# Altium PCB STM32F302VC_EVM.PcbDoc (part 3 of 19)
Units mil, origin at the board's own origin, x right, y up, seen from the top; angles counter-clockwise.
Board outline 3937.01 x 3937.01 mil, 2 copper layers (Top Layer, Bottom Layer); 117 components, 166 nets, 602 pads, 373 vias.
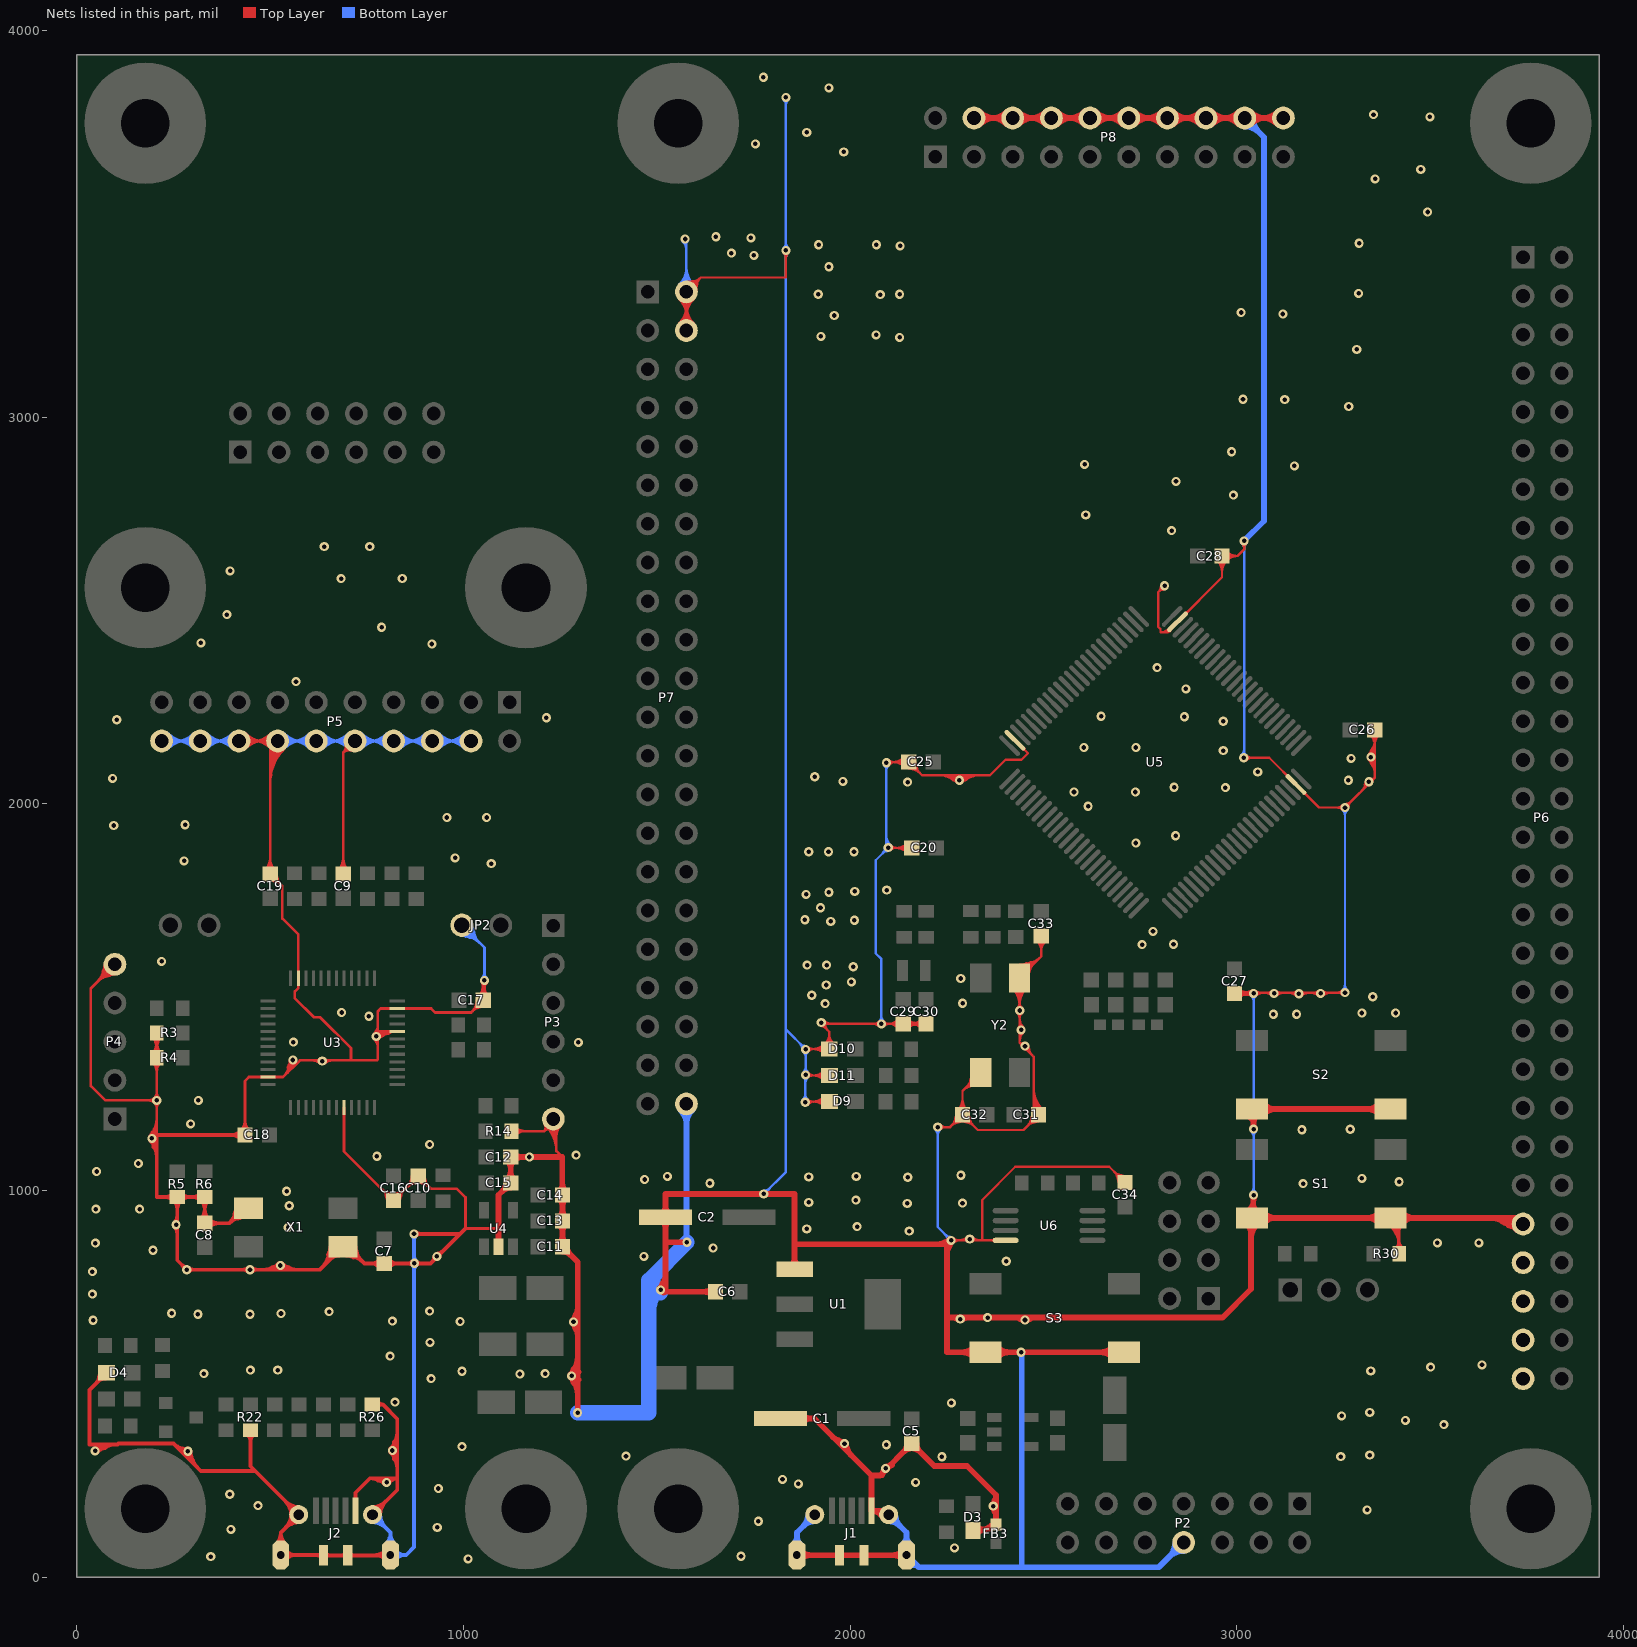
[diagram p3: the nets of this part, all layers, seen from the top]

## Via types
v1: diameter 23.62, hole 11.81, Top Layer to Bottom Layer, tented both sides, 372 vias
v2: diameter 50, hole 28, Top Layer to Bottom Layer, tented both sides, 1 vias

## Nets (pads, with @x,y where several pads share a name; then routed paths per layer and width w, separated by ;. In a path a pad name is that pad's centre, name@x,y a point inside that pad or via, vN(x,y) a via of type N, cw(c..) or ccw(c..) an arc to the next point about the centre after c; other vN are vias at no path point) (continued)
GND: (continued)
  Top Layer w6: P7.4@1576.38,3224.02 P7.2@1576.38,3324.02 1613.58,3361.22 ; v1(1833.66,3431.1) 1833.66,3361.22 1613.58,3361.22 ; v1(1883.86,1228.35) 1885.83,1230.32 D9.2@1946.72,1230.32 ; v1(1884.84,1299.13) 1886.73,1297.24 D11.2@1946.54,1297.24 ; v1@1885.83,1366.14 D10.2@1945.87,1366.14 1945.87,1410.43 1925.2,1431.1 v1(2080.71,1431.1) C29.1@2137.17,1431.1 C30.1@2196.22,1431.1 ; v1(2093.5,2106.3) 2095.47,2108.27 C25.1@2151.57,2108.27 2186.02,2073.82 2361.22,2073.82 2401.57,2114.17 2443.04,2114.17 2459.65,2130.78 U5.99@2426.07,2164.35 ; v1(2098.43,1886.81) 2099.41,1885.83 C20.1@2159.45,1885.83 ; v1(2226.38,1163.92) 2258.41,1163.92 C32.1@2290.35,1195.87 ; 2269.07,2068.61 cw(c2270.56,2047.31) v1@2284.57,2063.43 ; 2272.35,2067.43 ccw(c2284.59,2070.13) v1@2281.76,2057.92 ; v1@2280.39,2063.43 cw(c2294.4,2047.31) 2295.89,2068.61 ; v1@2283.2,2057.92 ccw(c2280.37,2070.13) 2292.61,2067.43 ; D3.2@2317.91,121.06 2362.2,121.06 ; Y2.4@2337.8,1304.99 2290.35,1257.55 ; FB3.1@2376.97,135.83 2362.2,121.06 ; U6.4@2402.05,871.06 2341.35,871.06 ; v1@2453.34,1364.9 cw(c2455.1,1353.24) 2462.14,1362.7 cw(c2465.86,1367.7) v1@2460.13,1370.15 ; C33.1@2494.09,1657.86 2494.09,1605.39 ; C34.1@2710.76,1020.67 2670.21,1061.21 2426.99,1061.21 2341.35,975.57 2341.35,871.06 ; v1(2812.99,2563.98) 2796.74,2547.72 2796.74,2457.45 2802.25,2451.93 2802.25,2443.9 2819.76,2443.9 U5.74@2846.44,2470.58 2961.61,2585.75 C28.1@2961.61,2640.75 3001.66,2640.75 ; C27.1@2994.09,1509.84 v1(3043.31,1509.84) ; v1(3017.72,2119.09) 3083.79,2119.09 U5.49@3152.67,2050.21 3212.6,1990.28 v1(3279.53,1990.28) 3356.3,2067.05 ; v1(3018.7,2680.12) 3018.7,2657.79 3001.66,2640.75 ; S1.2@3039.37,929.13 3043.31,933.07 v1(3043.31,988.19) ; S2.2@3039.37,1210.63 3043.31,1206.69 v1(3043.31,1158.95) ; v1@3045.28,1511.81 v1(3279.53,1511.81) ; v1@3333.45,2053.58 cw(c3328.01,2051.22) 3331.5,2046.43 cw(c3338.1,2037.36) v1@3340.02,2048.41 ; C26.1@3356.3,2190.94 3356.3,2067.05 ; S1.1@3397.64,929.13 3420.28,906.5 R30.2@3420.28,836.61 ; P7.4@1557.62,3242.77 ccw(c1512.33,3288.06) 1576.38,3288.06 ; P7.4@1557.62,3242.77 ccw(c1512.33,3288.06) 1576.38,3288.06 ; P7.4@1557.62,3242.77 ccw(c1512.33,3288.06) 1576.38,3288.06 ; P7.2@1557.62,3305.26 cw(c1512.33,3259.97) 1576.38,3259.97 ; P7.2@1557.62,3305.26 cw(c1512.33,3259.97) 1576.38,3259.97 ; P7.2@1557.62,3305.26 cw(c1512.33,3259.97) 1576.38,3259.97 ; P7.4@1561.86,3238.53 ccw(c1526.82,3273.57) 1576.38,3273.57 ; P7.4@1561.86,3238.53 ccw(c1526.82,3273.57) 1576.38,3273.57 ; P7.4@1561.86,3238.53 ccw(c1526.82,3273.57) 1576.38,3273.57 ; P7.2@1561.86,3309.5 cw(c1526.82,3274.46) 1576.38,3274.46 ; P7.2@1561.86,3309.5 cw(c1526.82,3274.46) 1576.38,3274.46 ; P7.2@1561.86,3309.5 cw(c1526.82,3274.46) 1576.38,3274.46 ; P7.2@1564.27,3333.65 cw(c1603.5,3302.43) 1597.83,3352.24 ; P7.2@1564.27,3333.65 cw(c1603.5,3302.43) 1597.83,3352.24 ; P7.2@1564.27,3333.65 cw(c1603.5,3302.43) 1597.83,3352.24 ; P7.4@1566.11,3234.29 ccw(c1541.31,3259.09) 1576.38,3259.09 ; P7.4@1566.11,3234.29 ccw(c1541.31,3259.09) 1576.38,3259.09 ; P7.4@1566.11,3234.29 ccw(c1541.31,3259.09) 1576.38,3259.09 ; P7.2@1566.11,3313.74 cw(c1541.31,3288.94) 1576.38,3288.94 ; P7.2@1566.11,3313.74 cw(c1541.31,3288.94) 1576.38,3288.94 ; P7.2@1566.11,3313.74 cw(c1541.31,3288.94) 1576.38,3288.94 ; 1576.38,3259.09 ccw(c1611.45,3259.09) P7.4@1586.65,3234.29 ; 1576.38,3259.09 ccw(c1611.45,3259.09) P7.4@1586.65,3234.29 ; 1576.38,3259.09 ccw(c1611.45,3259.09) P7.4@1586.65,3234.29 ; 1576.38,3259.97 cw(c1640.42,3259.97) P7.2@1595.14,3305.26 ; 1576.38,3259.97 cw(c1640.42,3259.97) P7.2@1595.14,3305.26 ; 1576.38,3259.97 cw(c1640.42,3259.97) P7.2@1595.14,3305.26 ; 1576.38,3273.57 ccw(c1625.94,3273.57) P7.4@1590.89,3238.53 ; 1576.38,3273.57 ccw(c1625.94,3273.57) P7.4@1590.89,3238.53 ; 1576.38,3273.57 ccw(c1625.94,3273.57) P7.4@1590.89,3238.53 ; 1576.38,3274.46 cw(c1625.94,3274.46) P7.2@1590.89,3309.5 ; 1576.38,3274.46 cw(c1625.94,3274.46) P7.2@1590.89,3309.5 ; 1576.38,3274.46 cw(c1625.94,3274.46) P7.2@1590.89,3309.5 ; 1576.38,3288.06 ccw(c1640.42,3288.06) P7.4@1595.14,3242.77 ; 1576.38,3288.06 ccw(c1640.42,3288.06) P7.4@1595.14,3242.77 ; 1576.38,3288.06 ccw(c1640.42,3288.06) P7.4@1595.14,3242.77 ; 1576.38,3288.94 cw(c1611.45,3288.94) P7.2@1586.65,3313.74 ; 1576.38,3288.94 cw(c1611.45,3288.94) P7.2@1586.65,3313.74 ; 1576.38,3288.94 cw(c1611.45,3288.94) P7.2@1586.65,3313.74 ; P7.2@1579.42,3344.32 ccw(c1583.88,3374.09) 1605.17,3352.8 ; P7.2@1579.42,3344.32 ccw(c1583.88,3374.09) 1605.17,3352.8 ; P7.2@1579.42,3344.32 ccw(c1583.88,3374.09) 1605.17,3352.8 ; P7.2@1580.31,3350.25 ccw(c1586.07,3388.73) 1613.58,3361.22 ; P7.2@1580.31,3350.25 ccw(c1586.07,3388.73) 1613.58,3361.22 ; P7.2@1580.31,3350.25 ccw(c1586.07,3388.73) 1613.58,3361.22 ; P7.2@1586.01,3311.91 ccw(c1554.8,3351.13) 1604.61,3345.47 ; P7.2@1586.01,3311.91 ccw(c1554.8,3351.13) 1604.61,3345.47 ; P7.2@1586.01,3311.91 ccw(c1554.8,3351.13) 1604.61,3345.47 ; P7.2@1596.68,3327.06 cw(c1626.46,3331.51) 1605.17,3352.8 ; P7.2@1596.68,3327.06 cw(c1626.46,3331.51) 1605.17,3352.8 ; P7.2@1596.68,3327.06 cw(c1626.46,3331.51) 1605.17,3352.8 ; P7.2@1602.61,3327.94 cw(c1641.09,3333.71) 1613.58,3361.22 ; P7.2@1602.61,3327.94 cw(c1641.09,3333.71) 1613.58,3361.22 ; P7.2@1602.61,3327.94 cw(c1641.09,3333.71) 1613.58,3361.22 ; v1@1827.43,3424.87 cw(c1812.39,3409.83) 1833.66,3409.83 ; v1@1827.43,3424.87 cw(c1812.39,3409.83) 1833.66,3409.83 ; v1@1827.43,3424.87 cw(c1812.39,3409.83) 1833.66,3409.83 ; 1833.66,3409.83 cw(c1854.93,3409.83) v1@1839.89,3424.87 ; 1833.66,3409.83 cw(c1854.93,3409.83) v1@1839.89,3424.87 ; 1833.66,3409.83 cw(c1854.93,3409.83) v1@1839.89,3424.87 ; v1@1890.09,1222.12 cw(c1909.88,1202.32) 1909.88,1230.32 ; v1@1890.09,1222.12 cw(c1909.88,1202.32) 1909.88,1230.32 ; v1@1890.09,1222.12 cw(c1909.88,1202.32) 1909.88,1230.32 ; v1@1890.09,1234.58 ccw(c1900.38,1244.86) 1900.38,1230.32 ; v1@1890.09,1234.58 ccw(c1900.38,1244.86) 1900.38,1230.32 ; v1@1890.09,1234.58 ccw(c1900.38,1244.86) 1900.38,1230.32 ; v1@1891.07,1292.9 cw(c1901.55,1282.42) 1901.55,1297.24 ; v1@1891.07,1292.9 cw(c1901.55,1282.42) 1901.55,1297.24 ; v1@1891.07,1292.9 cw(c1901.55,1282.42) 1901.55,1297.24 ; v1@1891.07,1305.36 ccw(c1910.68,1324.97) 1910.68,1297.24 ; v1@1891.07,1305.36 ccw(c1910.68,1324.97) 1910.68,1297.24 ; v1@1891.07,1305.36 ccw(c1910.68,1324.97) 1910.68,1297.24 ; v1@1891.07,1358.93 cw(c1908.49,1341.51) 1908.49,1366.14 ; v1@1891.07,1358.93 cw(c1908.49,1341.51) 1908.49,1366.14 ; v1@1891.07,1358.93 cw(c1908.49,1341.51) 1908.49,1366.14 ; v1@1891.07,1371.39 ccw(c1903.74,1384.05) 1903.74,1366.14 ; v1@1891.07,1371.39 ccw(c1903.74,1384.05) 1903.74,1366.14 ; v1@1891.07,1371.39 ccw(c1903.74,1384.05) 1903.74,1366.14 ; 1903.62,1366.14 cw(c1903.62,1325.86) D10.2@1932.1,1354.34 ; 1903.62,1366.14 ccw(c1903.62,1406.42) D10.2@1932.1,1377.94 ; 1903.62,1366.14 ccw(c1903.62,1406.42) D10.2@1932.1,1377.94 ; 1903.62,1366.14 cw(c1903.62,1325.86) D10.2@1932.1,1354.34 ; 1903.62,1366.14 ccw(c1903.62,1406.42) D10.2@1932.1,1377.94 ; 1903.62,1366.14 cw(c1903.62,1325.86) D10.2@1932.1,1354.34 ; 1904.29,1297.24 cw(c1904.29,1256.96) D11.2@1932.78,1285.45 ; 1904.29,1297.24 ccw(c1904.29,1337.53) D11.2@1932.78,1309.04 ; 1904.29,1297.24 ccw(c1904.29,1337.53) D11.2@1932.78,1309.04 ; 1904.29,1297.24 cw(c1904.29,1256.96) D11.2@1932.78,1285.45 ; 1904.29,1297.24 ccw(c1904.29,1337.53) D11.2@1932.78,1309.04 ; 1904.29,1297.24 cw(c1904.29,1256.96) D11.2@1932.78,1285.45 ; 1904.47,1230.32 cw(c1904.47,1190.03) D9.2@1932.96,1218.52 ; 1904.47,1230.32 ccw(c1904.47,1270.6) D9.2@1932.96,1242.11 ; 1904.47,1230.32 ccw(c1904.47,1270.6) D9.2@1932.96,1242.11 ; 1904.47,1230.32 cw(c1904.47,1190.03) D9.2@1932.96,1218.52 ; 1904.47,1230.32 ccw(c1904.47,1270.6) D9.2@1932.96,1242.11 ; 1904.47,1230.32 cw(c1904.47,1190.03) D9.2@1932.96,1218.52 ; 1918.1,1366.14 cw(c1918.1,1340.35) D10.2@1936.34,1358.59 ; 1918.1,1366.14 ccw(c1918.1,1391.94) D10.2@1936.34,1373.7 ; 1918.1,1366.14 ccw(c1918.1,1391.94) D10.2@1936.34,1373.7 ; 1918.1,1366.14 cw(c1918.1,1340.35) D10.2@1936.34,1358.59 ; 1918.1,1366.14 ccw(c1918.1,1391.94) D10.2@1936.34,1373.7 ; 1918.1,1366.14 cw(c1918.1,1340.35) D10.2@1936.34,1358.59 ; 1918.78,1297.24 cw(c1918.78,1271.45) D11.2@1937.02,1289.69 ; 1918.78,1297.24 ccw(c1918.78,1323.04) D11.2@1937.02,1304.8 ; 1918.78,1297.24 ccw(c1918.78,1323.04) D11.2@1937.02,1304.8 ; 1918.78,1297.24 cw(c1918.78,1271.45) D11.2@1937.02,1289.69 ; 1918.78,1297.24 ccw(c1918.78,1323.04) D11.2@1937.02,1304.8 ; 1918.78,1297.24 cw(c1918.78,1271.45) D11.2@1937.02,1289.69 ; 1918.96,1230.32 cw(c1918.96,1204.52) D9.2@1937.2,1222.76 ; 1918.96,1230.32 ccw(c1918.96,1256.11) D9.2@1937.2,1237.87 ; 1918.96,1230.32 ccw(c1918.96,1256.11) D9.2@1937.2,1237.87 ; 1918.96,1230.32 cw(c1918.96,1204.52) D9.2@1937.2,1222.76 ; 1918.96,1230.32 ccw(c1918.96,1256.11) D9.2@1937.2,1237.87 ; 1918.96,1230.32 cw(c1918.96,1204.52) D9.2@1937.2,1222.76 ; v1@1925.2,1425.24 cw(c1925.2,1411.1) 1935.2,1421.1 ; v1@1925.2,1425.24 cw(c1925.2,1411.1) 1935.2,1421.1 ; v1@1925.2,1425.24 cw(c1925.2,1411.1) 1935.2,1421.1 ; v1@1926.17,1437.09 cw(c1921.67,1423.02) 1935.94,1426.84 ; v1@1926.17,1437.09 cw(c1921.67,1423.02) 1935.94,1426.84 ; v1@1926.17,1437.09 cw(c1921.67,1423.02) 1935.94,1426.84 ; v1@1927.18,1436.04 ccw(c1939.11,1447.97) 1939.11,1431.1 ; v1@1927.18,1436.04 ccw(c1939.11,1447.97) 1939.11,1431.1 ; v1@1927.18,1436.04 ccw(c1939.11,1447.97) 1939.11,1431.1 ; v1@1928.01,1434.06 ccw(c1941.92,1434.06) 1932.08,1424.22 ; v1@1928.01,1434.06 ccw(c1941.92,1434.06) 1932.08,1424.22 ; v1@1928.01,1434.06 ccw(c1941.92,1434.06) 1932.08,1424.22 ; v1@1931.43,1427.82 cw(c1939.34,1419.91) 1939.34,1431.1 ; v1@1931.43,1427.82 cw(c1939.34,1419.91) 1939.34,1431.1 ; v1@1931.43,1427.82 cw(c1939.34,1419.91) 1939.34,1431.1 ; v1@1931.43,1440.29 ccw(c1953.6,1462.46) 1953.6,1431.1 ; v1@1931.43,1440.29 ccw(c1953.6,1462.46) 1953.6,1431.1 ; v1@1931.43,1440.29 ccw(c1953.6,1462.46) 1953.6,1431.1 ; v1@1934.01,1434.06 ccw(c1962.41,1434.06) 1942.33,1413.97 ; v1@1934.01,1434.06 ccw(c1962.41,1434.06) 1942.33,1413.97 ; v1@1934.01,1434.06 ccw(c1962.41,1434.06) 1942.33,1413.97 ; D10.2@1934.07,1377.94 ccw(c1905.59,1406.42) 1945.87,1406.42 ; D10.2@1934.07,1377.94 ccw(c1905.59,1406.42) 1945.87,1406.42 ; D10.2@1934.07,1377.94 ccw(c1905.59,1406.42) 1945.87,1406.42 ; D10.2@1938.31,1373.7 ccw(c1920.07,1391.94) 1945.87,1391.94 ; D10.2@1938.31,1373.7 ccw(c1920.07,1391.94) 1945.87,1391.94 ; D10.2@1938.31,1373.7 ccw(c1920.07,1391.94) 1945.87,1391.94 ; 1945.87,1391.94 ccw(c1971.66,1391.94) D10.2@1953.42,1373.7 ; 1945.87,1391.94 ccw(c1971.66,1391.94) D10.2@1953.42,1373.7 ; 1945.87,1391.94 ccw(c1971.66,1391.94) D10.2@1953.42,1373.7 ; 1945.87,1406.42 ccw(c1986.15,1406.42) D10.2@1957.66,1377.94 ; 1945.87,1406.42 ccw(c1986.15,1406.42) D10.2@1957.66,1377.94 ; 1945.87,1406.42 ccw(c1986.15,1406.42) D10.2@1957.66,1377.94 ; 2059.44,1431.1 cw(c2059.44,1409.83) v1@2074.48,1424.87 ; 2059.44,1431.1 ccw(c2059.44,1452.37) v1@2074.48,1437.33 ; 2059.44,1431.1 ccw(c2059.44,1452.37) v1@2074.48,1437.33 ; 2059.44,1431.1 cw(c2059.44,1409.83) v1@2074.48,1424.87 ; 2059.44,1431.1 ccw(c2059.44,1452.37) v1@2074.48,1437.33 ; 2059.44,1431.1 cw(c2059.44,1409.83) v1@2074.48,1424.87 ; v1@2086.94,1424.87 cw(c2101.98,1409.83) 2101.98,1431.1 ; v1@2086.94,1424.87 cw(c2101.98,1409.83) 2101.98,1431.1 ; v1@2086.94,1424.87 cw(c2101.98,1409.83) 2101.98,1431.1 ; v1@2086.94,1437.33 ccw(c2101.98,1452.37) 2101.98,1431.1 ; v1@2086.94,1437.33 ccw(c2101.98,1452.37) 2101.98,1431.1 ; v1@2086.94,1437.33 ccw(c2101.98,1452.37) 2101.98,1431.1 ; 2096.88,1431.1 cw(c2096.88,1390.82) C29.1@2125.37,1419.3 ; 2096.88,1431.1 ccw(c2096.88,1471.38) C29.1@2125.37,1442.9 ; 2096.88,1431.1 ccw(c2096.88,1471.38) C29.1@2125.37,1442.9 ; 2096.88,1431.1 cw(c2096.88,1390.82) C29.1@2125.37,1419.3 ; 2096.88,1431.1 ccw(c2096.88,1471.38) C29.1@2125.37,1442.9 ; 2096.88,1431.1 cw(c2096.88,1390.82) C29.1@2125.37,1419.3 ; v1@2099.73,2100.07 cw(c2119.53,2080.28) 2119.53,2108.27 ; v1@2099.73,2100.07 cw(c2119.53,2080.28) 2119.53,2108.27 ; v1@2099.73,2100.07 cw(c2119.53,2080.28) 2119.53,2108.27 ; v1@2099.73,2112.53 ccw(c2110.02,2122.82) 2110.02,2108.27 ; v1@2099.73,2112.53 ccw(c2110.02,2122.82) 2110.02,2108.27 ; v1@2099.73,2112.53 ccw(c2110.02,2122.82) 2110.02,2108.27 ; v1@2104.66,1880.58 cw(c2117.32,1867.92) 2117.32,1885.83 ; v1@2104.66,1880.58 cw(c2117.32,1867.92) 2117.32,1885.83 ; v1@2104.66,1880.58 cw(c2117.32,1867.92) 2117.32,1885.83 ; v1@2104.66,1893.04 ccw(c2122.07,1910.46) 2122.07,1885.83 ; v1@2104.66,1893.04 ccw(c2122.07,1910.46) 2122.07,1885.83 ; v1@2104.66,1893.04 ccw(c2122.07,1910.46) 2122.07,1885.83 ; 2111.29,2108.27 cw(c2111.29,2067.99) C25.1@2139.78,2096.47 ; 2111.29,2108.27 ccw(c2111.29,2148.55) C25.1@2139.78,2120.07 ; 2111.29,2108.27 ccw(c2111.29,2148.55) C25.1@2139.78,2120.07 ; 2111.29,2108.27 cw(c2111.29,2067.99) C25.1@2139.78,2096.47 ; 2111.29,2108.27 ccw(c2111.29,2148.55) C25.1@2139.78,2120.07 ; 2111.29,2108.27 cw(c2111.29,2067.99) C25.1@2139.78,2096.47 ; 2111.37,1431.1 cw(c2111.37,1405.31) C29.1@2129.61,1423.55 ; 2111.37,1431.1 ccw(c2111.37,1456.9) C29.1@2129.61,1438.66 ; 2111.37,1431.1 ccw(c2111.37,1456.9) C29.1@2129.61,1438.66 ; 2111.37,1431.1 cw(c2111.37,1405.31) C29.1@2129.61,1423.55 ; 2111.37,1431.1 ccw(c2111.37,1456.9) C29.1@2129.61,1438.66 ; 2111.37,1431.1 cw(c2111.37,1405.31) C29.1@2129.61,1423.55 ; 2119.17,1885.83 cw(c2119.17,1845.55) C20.1@2147.65,1874.03 ; 2119.17,1885.83 ccw(c2119.17,1926.11) C20.1@2147.65,1897.62 ; 2119.17,1885.83 ccw(c2119.17,1926.11) C20.1@2147.65,1897.62 ; 2119.17,1885.83 cw(c2119.17,1845.55) C20.1@2147.65,1874.03 ; 2119.17,1885.83 ccw(c2119.17,1926.11) C20.1@2147.65,1897.62 ; 2119.17,1885.83 cw(c2119.17,1845.55) C20.1@2147.65,1874.03 ; 2125.78,2108.27 cw(c2125.78,2082.47) C25.1@2144.02,2100.71 ; 2125.78,2108.27 ccw(c2125.78,2134.06) C25.1@2144.02,2115.82 ; 2125.78,2108.27 ccw(c2125.78,2134.06) C25.1@2144.02,2115.82 ; 2125.78,2108.27 cw(c2125.78,2082.47) C25.1@2144.02,2100.71 ; 2125.78,2108.27 ccw(c2125.78,2134.06) C25.1@2144.02,2115.82 ; 2125.78,2108.27 cw(c2125.78,2082.47) C25.1@2144.02,2100.71 ; 2133.65,1885.83 cw(c2133.65,1860.03) C20.1@2151.89,1878.27 ; 2133.65,1885.83 ccw(c2133.65,1911.62) C20.1@2151.89,1893.38 ; 2133.65,1885.83 ccw(c2133.65,1911.62) C20.1@2151.89,1893.38 ; 2133.65,1885.83 cw(c2133.65,1860.03) C20.1@2151.89,1878.27 ; 2133.65,1885.83 ccw(c2133.65,1911.62) C20.1@2151.89,1893.38 ; 2133.65,1885.83 cw(c2133.65,1860.03) C20.1@2151.89,1878.27 ; C25.1@2144.41,2106.8 ccw(c2167.18,2111.46) C25.1@2161.16,2089.01 ; C25.1@2144.41,2106.8 ccw(c2167.18,2111.46) C25.1@2161.16,2089.01 ; C25.1@2144.41,2106.8 ccw(c2167.18,2111.46) C25.1@2161.16,2089.01 ; C29.1@2144.72,1423.55 cw(c2162.96,1405.31) 2162.96,1431.1 ; C29.1@2144.72,1423.55 cw(c2162.96,1405.31) 2162.96,1431.1 ; C29.1@2144.72,1423.55 cw(c2162.96,1405.31) 2162.96,1431.1 ; C29.1@2144.72,1438.66 ccw(c2162.96,1456.9) 2162.96,1431.1 ; C29.1@2144.72,1438.66 ccw(c2162.96,1456.9) 2162.96,1431.1 ; C29.1@2144.72,1438.66 ccw(c2162.96,1456.9) 2162.96,1431.1 ; C29.1@2146.35,1425.65 cw(c2155.56,1420.18) 2158.07,1430.59 ; C29.1@2146.35,1425.65 cw(c2155.56,1420.18) 2158.07,1430.59 ; C29.1@2146.35,1425.65 cw(c2155.56,1420.18) 2158.07,1430.59 ; C29.1@2146.35,1425.65 cw(c2155.56,1420.18) 2158.07,1430.59 ; C29.1@2146.35,1436.56 ccw(c2155.56,1442.02) 2158.07,1431.62 ; C29.1@2146.35,1436.56 ccw(c2155.56,1442.02) 2158.07,1431.62 ; C29.1@2146.35,1436.56 ccw(c2155.56,1442.02) 2158.07,1431.62 ; C29.1@2146.35,1436.56 ccw(c2155.56,1442.02) 2158.07,1431.62 ; C29.1@2148.96,1419.3 cw(c2177.45,1390.82) C30.1@2177.45,1431.1 ; C29.1@2148.96,1419.3 cw(c2177.45,1390.82) C30.1@2177.45,1431.1 ; C29.1@2148.96,1419.3 cw(c2177.45,1390.82) C30.1@2177.45,1431.1 ; C29.1@2148.96,1442.9 ccw(c2177.45,1471.38) C30.1@2177.45,1431.1 ; C29.1@2148.96,1442.9 ccw(c2177.45,1471.38) C30.1@2177.45,1431.1 ; C29.1@2148.96,1442.9 ccw(c2177.45,1471.38) C30.1@2177.45,1431.1 ; C25.1@2150.29,2108 ccw(c2177.81,2113.64) 2170.54,2086.5 ; C25.1@2150.29,2108 ccw(c2177.81,2113.64) 2170.54,2086.5 ; C25.1@2150.29,2108 ccw(c2177.81,2113.64) 2170.54,2086.5 ; C29.1@2151.51,1422.58 cw(c2162.87,1415.84) 2165.97,1428.68 ; C29.1@2151.51,1422.58 cw(c2162.87,1415.84) 2165.97,1428.68 ; C29.1@2151.51,1422.58 cw(c2162.87,1415.84) 2165.97,1428.68 ; C29.1@2151.51,1422.58 cw(c2162.87,1415.84) 2165.97,1428.68 ; C29.1@2151.51,1439.62 ccw(c2162.87,1446.36) 2165.97,1433.52 ; C29.1@2151.51,1439.62 ccw(c2162.87,1446.36) 2165.97,1433.52 ; C29.1@2151.51,1439.62 ccw(c2162.87,1446.36) 2165.97,1433.52 ; C29.1@2151.51,1439.62 ccw(c2162.87,1446.36) 2165.97,1433.52 ; C25.1@2151.57,2091.58 cw(c2151.57,2051.3) 2180.06,2079.78 ; C25.1@2151.57,2091.58 cw(c2151.57,2051.3) 2180.06,2079.78 ; C25.1@2151.57,2091.58 cw(c2151.57,2051.3) 2180.06,2079.78 ; C25.1@2151.57,2097.58 cw(c2151.57,2071.79) C25.1@2169.82,2090.03 ; C25.1@2151.57,2097.58 cw(c2151.57,2071.79) C25.1@2169.82,2090.03 ; C25.1@2151.57,2097.58 cw(c2151.57,2071.79) C25.1@2169.82,2090.03 ; C29.1@2151.63,1422.78 cw(c2171.29,1411.47) 2165.97,1433.52 ; C29.1@2151.63,1422.78 cw(c2171.29,1411.47) 2165.97,1433.52 ; C29.1@2151.63,1422.78 cw(c2171.29,1411.47) 2165.97,1433.52 ; C29.1@2151.63,1422.78 cw(c2171.29,1411.47) 2165.97,1433.52 ; C29.1@2151.63,1439.42 ccw(c2171.29,1450.73) 2165.97,1428.68 ; C29.1@2151.63,1439.42 ccw(c2171.29,1450.73) 2165.97,1428.68 ; C29.1@2151.63,1439.42 ccw(c2171.29,1450.73) 2165.97,1428.68 ; C29.1@2151.63,1439.42 ccw(c2171.29,1450.73) 2165.97,1428.68 ; C25.1@2151.84,2109.56 cw(c2146.2,2082.03) 2173.34,2089.3 ; C25.1@2151.84,2109.56 cw(c2146.2,2082.03) 2173.34,2089.3 ; C25.1@2151.84,2109.56 cw(c2146.2,2082.03) 2173.34,2089.3 ; C25.1@2153.04,2115.43 cw(c2148.38,2092.67) C25.1@2170.83,2098.68 ; C25.1@2153.04,2115.43 cw(c2148.38,2092.67) C25.1@2170.83,2098.68 ; C25.1@2153.04,2115.43 cw(c2148.38,2092.67) C25.1@2170.83,2098.68 ; C29.1@2155.94,1431.1 cw(c2155.94,1390.82) C30.1@2184.42,1419.3 ; C29.1@2155.94,1431.1 ccw(c2155.94,1471.38) C30.1@2184.42,1442.9 ; C29.1@2155.94,1431.1 ccw(c2155.94,1471.38) C30.1@2184.42,1442.9 ; C29.1@2155.94,1431.1 cw(c2155.94,1390.82) C30.1@2184.42,1419.3 ; C29.1@2155.94,1431.1 ccw(c2155.94,1471.38) C30.1@2184.42,1442.9 ; C29.1@2155.94,1431.1 cw(c2155.94,1390.82) C30.1@2184.42,1419.3 ; C25.1@2162.26,2108.27 ccw(c2188.06,2108.27) C25.1@2169.82,2090.03 ; C25.1@2162.26,2108.27 ccw(c2188.06,2108.27) C25.1@2169.82,2090.03 ; C25.1@2162.26,2108.27 ccw(c2188.06,2108.27) C25.1@2169.82,2090.03 ; 2167.42,1428.68 cw(c2170.52,1415.84) C30.1@2181.87,1422.58 ; 2167.42,1428.68 ccw(c2162.09,1450.73) C30.1@2181.76,1439.42 ; 2167.42,1428.68 cw(c2170.52,1415.84) C30.1@2181.87,1422.58 ; 2167.42,1428.68 ccw(c2162.09,1450.73) C30.1@2181.76,1439.42 ; 2167.42,1428.68 ccw(c2162.09,1450.73) C30.1@2181.76,1439.42 ; 2167.42,1428.68 cw(c2170.52,1415.84) C30.1@2181.87,1422.58 ; 2167.42,1428.68 ccw(c2162.09,1450.73) C30.1@2181.76,1439.42 ; 2167.42,1428.68 cw(c2170.52,1415.84) C30.1@2181.87,1422.58 ; 2167.42,1428.68 ccw(c2162.09,1450.73) C30.1@2181.76,1439.42 ; 2167.42,1428.68 cw(c2170.52,1415.84) C30.1@2181.87,1422.58 ; 2167.42,1433.52 cw(c2162.09,1411.47) C30.1@2181.76,1422.78 ; 2167.42,1433.52 ccw(c2170.52,1446.36) C30.1@2181.87,1439.62 ; 2167.42,1433.52 cw(c2162.09,1411.47) C30.1@2181.76,1422.78 ; 2167.42,1433.52 ccw(c2170.52,1446.36) C30.1@2181.87,1439.62 ; 2167.42,1433.52 ccw(c2170.52,1446.36) C30.1@2181.87,1439.62 ; 2167.42,1433.52 cw(c2162.09,1411.47) C30.1@2181.76,1422.78 ; 2167.42,1433.52 ccw(c2170.52,1446.36) C30.1@2181.87,1439.62 ; 2167.42,1433.52 cw(c2162.09,1411.47) C30.1@2181.76,1422.78 ; 2167.42,1433.52 ccw(c2170.52,1446.36) C30.1@2181.87,1439.62 ; 2167.42,1433.52 cw(c2162.09,1411.47) C30.1@2181.76,1422.78 ; C25.1@2168.26,2108.27 ccw(c2208.54,2108.27) 2180.06,2079.78 ; C25.1@2168.26,2108.27 ccw(c2208.54,2108.27) 2180.06,2079.78 ; C25.1@2168.26,2108.27 ccw(c2208.54,2108.27) 2180.06,2079.78 ; 2170.42,1431.1 cw(c2170.42,1405.31) C30.1@2188.66,1423.55 ; 2170.42,1431.1 ccw(c2170.42,1456.9) C30.1@2188.66,1438.66 ; 2170.42,1431.1 ccw(c2170.42,1456.9) C30.1@2188.66,1438.66 ; 2170.42,1431.1 cw(c2170.42,1405.31) C30.1@2188.66,1423.55 ; 2170.42,1431.1 ccw(c2170.42,1456.9) C30.1@2188.66,1438.66 ; 2170.42,1431.1 cw(c2170.42,1405.31) C30.1@2188.66,1423.55 ; 2175.32,1430.59 cw(c2177.83,1420.18) C30.1@2187.03,1425.65 ; 2175.32,1430.59 cw(c2177.83,1420.18) C30.1@2187.03,1425.65 ; 2175.32,1430.59 cw(c2177.83,1420.18) C30.1@2187.03,1425.65 ; 2175.32,1430.59 cw(c2177.83,1420.18) C30.1@2187.03,1425.65 ; 2175.32,1430.59 cw(c2177.83,1420.18) C30.1@2187.03,1425.65 ; 2175.32,1431.62 ccw(c2177.83,1442.02) C30.1@2187.03,1436.56 ; 2175.32,1431.62 ccw(c2177.83,1442.02) C30.1@2187.03,1436.56 ; 2175.32,1431.62 ccw(c2177.83,1442.02) C30.1@2187.03,1436.56 ; 2175.32,1431.62 ccw(c2177.83,1442.02) C30.1@2187.03,1436.56 ; 2175.32,1431.62 ccw(c2177.83,1442.02) C30.1@2187.03,1436.56 ; 2230.32,2073.82 cw(c2230.32,2008.86) v1@2276.25,2054.79 ; 2230.32,2073.82 cw(c2230.32,2008.86) v1@2276.25,2054.79 ; 2230.32,2073.82 cw(c2230.32,2008.86) v1@2276.25,2054.79 ; v1@2232.61,1157.69 cw(c2247.65,1142.65) 2247.65,1163.92 ; v1@2232.61,1157.69 cw(c2247.65,1142.65) 2247.65,1163.92 ; v1@2232.61,1157.69 cw(c2247.65,1142.65) 2247.65,1163.92 ; v1@2232.61,1170.15 ccw(c2247.65,1185.19) 2247.65,1163.92 ; v1@2232.61,1170.15 ccw(c2247.65,1185.19) 2247.65,1163.92 ; v1@2232.61,1170.15 ccw(c2247.65,1185.19) 2247.65,1163.92 ; 2244.8,2073.82 cw(c2244.8,2023.35) v1@2280.49,2059.04 ; 2244.8,2073.82 cw(c2244.8,2023.35) v1@2280.49,2059.04 ; 2244.8,2073.82 cw(c2244.8,2023.35) v1@2280.49,2059.04 ; 2250.71,860.94 cw(c2255.81,855.84) v1@2258.07,862.69 ; 2250.71,860.94 ccw(c2245.6,866.05) v1@2252.46,868.31 ; 2250.71,860.94 ccw(c2245.6,866.05) v1@2252.46,868.31 ; 2250.71,860.94 cw(c2255.81,855.84) v1@2258.07,862.69 ; 2250.71,860.94 ccw(c2245.6,866.05) v1@2252.46,868.31 ; 2250.71,860.94 cw(c2255.81,855.84) v1@2258.07,862.69 ; 2250.7,860.94 v1(2260.83,871.06) 2341.35,871.06 ; 2258.05,2066.93 ccw(c2266.86,2080.14) v1@2276.9,2067.85 ; 2258.05,2066.93 ccw(c2266.86,2080.14) v1@2276.9,2067.85 ; 2258.05,2066.93 ccw(c2266.86,2080.14) v1@2276.9,2067.85 ; 2259.23,2071.31 ccw(c2271.57,2092.69) v1@2279.61,2069.35 ; 2259.23,2071.31 ccw(c2271.57,2092.69) v1@2279.61,2069.35 ; 2259.23,2071.31 ccw(c2271.57,2092.69) v1@2279.61,2069.35 ; 2259.29,2073.82 cw(c2259.29,2037.83) v1@2284.74,2063.28 ; 2259.29,2073.82 cw(c2259.29,2037.83) v1@2284.74,2063.28 ; 2259.29,2073.82 cw(c2259.29,2037.83) v1@2284.74,2063.28 ; 2261.87,1167.38 cw(c2290.35,1138.9) C32.1@2290.35,1179.18 ; 2261.87,1167.38 ccw(c2233.39,1195.87) C32.1@2273.67,1195.87 ; 2261.87,1167.38 ccw(c2233.39,1195.87) C32.1@2273.67,1195.87 ; 2261.87,1167.38 cw(c2290.35,1138.9) C32.1@2290.35,1179.18 ; 2261.87,1167.38 ccw(c2233.39,1195.87) C32.1@2273.67,1195.87 ; 2261.87,1167.38 cw(c2290.35,1138.9) C32.1@2290.35,1179.18 ; 2264.8,2062.43 ccw(c2272.23,2073.56) v1@2280.7,2063.2 ; 2264.8,2062.43 ccw(c2272.23,2073.56) v1@2280.7,2063.2 ; 2264.8,2062.43 ccw(c2272.23,2073.56) v1@2280.7,2063.2 ; v1@2267.06,864.83 cw(c2282.1,849.79) 2282.1,871.06 ; v1@2267.06,864.83 cw(c2282.1,849.79) 2282.1,871.06 ; v1@2267.06,864.83 cw(c2282.1,849.79) 2282.1,871.06 ; v1@2267.06,877.29 ccw(c2282.1,892.33) 2282.1,871.06 ; v1@2267.06,877.29 ccw(c2282.1,892.33) 2282.1,871.06 ; v1@2267.06,877.29 ccw(c2282.1,892.33) 2282.1,871.06 ; 2267.06,2073.48 cw(c2260.44,2062) v1@2273.68,2061.41 ; 2267.06,2073.48 cw(c2260.44,2062) v1@2273.68,2061.41 ; 2267.06,2073.48 cw(c2260.44,2062) v1@2273.68,2061.41 ; 2268.38,2066.03 cw(c2262.38,2055.64) v1@2273.97,2058.74 ; 2268.38,2066.03 cw(c2262.38,2055.64) v1@2273.97,2058.74 ; 2268.38,2066.03 cw(c2262.38,2055.64) v1@2273.97,2058.74 ; 2268.59,1176.9 cw(c2295.73,1169.63) C32.1@2290.09,1197.15 ; 2268.59,1176.9 cw(c2295.73,1169.63) C32.1@2290.09,1197.15 ; 2268.59,1176.9 cw(c2295.73,1169.63) C32.1@2290.09,1197.15 ; 2270.62,2064.73 ccw(c2277.25,2076.21) v1@2281.56,2063.68 ; 2270.62,2064.73 ccw(c2277.25,2076.21) v1@2281.56,2063.68 ; 2270.62,2064.73 ccw(c2277.25,2076.21) v1@2281.56,2063.68 ; C32.1@2271.1,1186.28 cw(c2293.55,1180.26) C32.1@2288.89,1203.03 ; C32.1@2271.1,1186.28 cw(c2293.55,1180.26) C32.1@2288.89,1203.03 ; C32.1@2271.1,1186.28 cw(c2293.55,1180.26) C32.1@2288.89,1203.03 ; 2271.39,1174.1 ccw(c2264.12,1201.24) C32.1@2291.64,1195.6 ; 2271.39,1174.1 ccw(c2264.12,1201.24) C32.1@2291.64,1195.6 ; 2271.39,1174.1 ccw(c2264.12,1201.24) C32.1@2291.64,1195.6 ; 2272.04,2070.61 ccw(c2277.42,2079.92) v1@2280.2,2069.53 ; 2272.04,2070.61 ccw(c2277.42,2079.92) v1@2280.2,2069.53 ; 2272.04,2070.61 ccw(c2277.42,2079.92) v1@2280.2,2069.53 ; C32.1@2272.11,1177.63 cw(c2290.35,1159.39) C32.1@2290.35,1185.18 ; C32.1@2272.11,1177.63 ccw(c2253.87,1195.87) C32.1@2279.67,1195.87 ; C32.1@2272.11,1177.63 ccw(c2253.87,1195.87) C32.1@2279.67,1195.87 ; C32.1@2272.11,1177.63 cw(c2290.35,1159.39) C32.1@2290.35,1185.18 ; C32.1@2272.11,1177.63 ccw(c2253.87,1195.87) C32.1@2279.67,1195.87 ; C32.1@2272.11,1177.63 cw(c2290.35,1159.39) C32.1@2290.35,1185.18 ; 2273.77,2073.82 cw(c2273.77,2052.32) v1@2288.98,2067.52 ; 2273.77,2073.82 cw(c2273.77,2052.32) v1@2288.98,2067.52 ; 2273.77,2073.82 cw(c2273.77,2052.32) v1@2288.98,2067.52 ; v1@2275.98,2067.52 cw(c2291.19,2052.32) 2291.19,2073.82 ; v1@2275.98,2067.52 cw(c2291.19,2052.32) 2291.19,2073.82 ; v1@2275.98,2067.52 cw(c2291.19,2052.32) 2291.19,2073.82 ; C32.1@2278.56,1207.66 ccw(c2250.07,1236.15) 2290.35,1236.15 ; C32.1@2278.56,1207.66 ccw(c2250.07,1236.15) 2290.35,1236.15 ; C32.1@2278.56,1207.66 ccw(c2250.07,1236.15) 2290.35,1236.15 ; 2280.27,871.06 ccw(c2280.27,902.96) v1@2302.82,880.41 ; 2280.27,871.06 ccw(c2280.27,902.96) v1@2302.82,880.41 ; 2280.27,871.06 ccw(c2280.27,902.96) v1@2302.82,880.41 ; v1@2280.23,2063.28 cw(c2305.67,2037.83) 2305.67,2073.82 ; v1@2280.23,2063.28 cw(c2305.67,2037.83) 2305.67,2073.82 ; v1@2280.23,2063.28 cw(c2305.67,2037.83) 2305.67,2073.82 ; C32.1@2280.77,1176.61 ccw(c2274.75,1199.06) C32.1@2297.52,1194.4 ; C32.1@2280.77,1176.61 ccw(c2274.75,1199.06) C32.1@2297.52,1194.4 ; C32.1@2280.77,1176.61 ccw(c2274.75,1199.06) C32.1@2297.52,1194.4 ; C32.1@2282.8,1203.42 ccw(c2264.56,1221.66) 2290.35,1221.66 ; C32.1@2282.8,1203.42 ccw(c2264.56,1221.66) 2290.35,1221.66 ; C32.1@2282.8,1203.42 ccw(c2264.56,1221.66) 2290.35,1221.66 ; C32.1@2283.19,1194.4 ccw(c2305.96,1199.06) C32.1@2299.94,1176.61 ; C32.1@2283.19,1194.4 ccw(c2305.96,1199.06) C32.1@2299.94,1176.61 ; C32.1@2283.19,1194.4 ccw(c2305.96,1199.06) C32.1@2299.94,1176.61 ; v1@2283.4,2063.68 ccw(c2287.71,2076.21) 2294.34,2064.73 ; v1@2283.4,2063.68 ccw(c2287.71,2076.21) 2294.34,2064.73 ; v1@2283.4,2063.68 ccw(c2287.71,2076.21) 2294.34,2064.73 ; v1@2284.26,2063.2 ccw(c2292.73,2073.56) 2300.16,2062.43 ; v1@2284.26,2063.2 ccw(c2292.73,2073.56) 2300.16,2062.43 ; v1@2284.26,2063.2 ccw(c2292.73,2073.56) 2300.16,2062.43 ; v1@2284.47,2059.04 cw(c2320.16,2023.35) 2320.16,2073.82 ; v1@2284.47,2059.04 cw(c2320.16,2023.35) 2320.16,2073.82 ; v1@2284.47,2059.04 cw(c2320.16,2023.35) 2320.16,2073.82 ; v1@2284.76,2069.53 ccw(c2287.54,2079.92) 2292.92,2070.61 ; v1@2284.76,2069.53 ccw(c2287.54,2079.92) 2292.92,2070.61 ; v1@2284.76,2069.53 ccw(c2287.54,2079.92) 2292.92,2070.61 ; v1@2285.35,2069.35 ccw(c2293.39,2092.69) 2305.74,2071.31 ; v1@2285.35,2069.35 ccw(c2293.39,2092.69) 2305.74,2071.31 ; v1@2285.35,2069.35 ccw(c2293.39,2092.69) 2305.74,2071.31 ; v1@2288.06,2067.85 ccw(c2298.1,2080.14) 2306.91,2066.93 ; v1@2288.06,2067.85 ccw(c2298.1,2080.14) 2306.91,2066.93 ; v1@2288.06,2067.85 ccw(c2298.1,2080.14) 2306.91,2066.93 ; v1@2288.71,2054.79 cw(c2334.64,2008.86) 2334.64,2073.82 ; v1@2288.71,2054.79 cw(c2334.64,2008.86) 2334.64,2073.82 ; v1@2288.71,2054.79 cw(c2334.64,2008.86) 2334.64,2073.82 ; C32.1@2289.07,1195.6 ccw(c2316.59,1201.24) 2309.32,1174.1 ; C32.1@2289.07,1195.6 ccw(c2316.59,1201.24) 2309.32,1174.1 ; C32.1@2289.07,1195.6 ccw(c2316.59,1201.24) 2309.32,1174.1 ; C32.1@2290.35,1179.18 cw(c2290.35,1138.9) 2318.84,1167.38 ; C32.1@2290.35,1179.18 cw(c2290.35,1138.9) 2318.84,1167.38 ; C32.1@2290.35,1179.18 cw(c2290.35,1138.9) 2318.84,1167.38 ; C32.1@2290.35,1185.18 cw(c2290.35,1159.39) C32.1@2308.59,1177.63 ; C32.1@2290.35,1185.18 cw(c2290.35,1159.39) C32.1@2308.59,1177.63 ; C32.1@2290.35,1185.18 cw(c2290.35,1159.39) C32.1@2308.59,1177.63 ; C32.1@2290.35,1195.87 2290.35,1257.55 ; C32.1@2290.35,1195.87 2329.72,1156.5 2447.83,1156.5 C31.1@2487.2,1195.87 2474.35,1208.72 2474.35,1346.12 2437.8,1382.68 ; 2290.35,1221.66 ccw(c2316.15,1221.66) C32.1@2297.91,1203.42 ; 2290.35,1221.66 ccw(c2316.15,1221.66) C32.1@2297.91,1203.42 ; 2290.35,1221.66 ccw(c2316.15,1221.66) C32.1@2297.91,1203.42 ; 2290.35,1236.15 ccw(c2330.64,1236.15) C32.1@2302.15,1207.66 ; 2290.35,1236.15 ccw(c2330.64,1236.15) C32.1@2302.15,1207.66 ; 2290.35,1236.15 ccw(c2330.64,1236.15) C32.1@2302.15,1207.66 ; 2290.36,1257.55 cw(c2324.69,1223.22) Y2.4@2333.39,1270.99 ; 2290.36,1257.55 cw(c2324.69,1223.22) Y2.4@2333.39,1270.99 ; 2290.36,1257.55 cw(c2324.69,1223.22) Y2.4@2333.39,1270.99 ; C32.1@2290.62,1197.15 cw(c2284.98,1169.63) 2312.12,1176.9 ; C32.1@2290.62,1197.15 cw(c2284.98,1169.63) 2312.12,1176.9 ; C32.1@2290.62,1197.15 cw(c2284.98,1169.63) 2312.12,1176.9 ; v1@2290.99,2058.74 cw(c2302.58,2055.64) 2296.58,2066.03 ; v1@2290.99,2058.74 cw(c2302.58,2055.64) 2296.58,2066.03 ; v1@2290.99,2058.74 cw(c2302.58,2055.64) 2296.58,2066.03 ; v1@2291.28,2061.41 cw(c2304.53,2062) 2297.9,2073.48 ; v1@2291.28,2061.41 cw(c2304.53,2062) 2297.9,2073.48 ; v1@2291.28,2061.41 cw(c2304.53,2062) 2297.9,2073.48 ; C32.1@2291.82,1203.03 cw(c2287.16,1180.26) C32.1@2309.61,1186.28 ; C32.1@2291.82,1203.03 cw(c2287.16,1180.26) C32.1@2309.61,1186.28 ; C32.1@2291.82,1203.03 cw(c2287.16,1180.26) C32.1@2309.61,1186.28 ; 2294.75,871.06 ccw(c2294.75,888.48) v1@2307.07,876.16 ; 2294.75,871.06 ccw(c2294.75,888.48) v1@2307.07,876.16 ; 2294.75,871.06 ccw(c2294.75,888.48) v1@2307.07,876.16 ; 2295.3,871.06 cw(c2295.3,860.42) v1@2302.82,867.95 ; 2295.3,871.06 cw(c2295.3,860.42) v1@2302.82,867.95 ; 2295.3,871.06 cw(c2295.3,860.42) v1@2302.82,867.95 ; 2298.45,1265.65 cw(c2327.19,1236.91) Y2.4@2334.47,1276.89 ; 2298.45,1265.65 cw(c2327.19,1236.91) Y2.4@2334.47,1276.89 ; 2298.45,1265.65 cw(c2327.19,1236.91) Y2.4@2334.47,1276.89 ; C32.1@2301.04,1195.87 ccw(c2326.84,1195.87) C32.1@2308.59,1177.63 ; C32.1@2301.04,1195.87 ccw(c2326.84,1195.87) C32.1@2308.59,1177.63 ; C32.1@2301.04,1195.87 ccw(c2326.84,1195.87) C32.1@2308.59,1177.63 ; 2302.83,1270.03 ccw(c2277.71,1295.15) Y2.4@2313.24,1295.15 ; 2302.83,1270.03 ccw(c2277.71,1295.15) Y2.4@2313.24,1295.15 ; 2302.83,1270.03 ccw(c2277.71,1295.15) Y2.4@2313.24,1295.15 ; 2306.54,1273.74 cw(c2329.68,1250.6) Y2.4@2335.54,1282.79 ; 2306.54,1273.74 cw(c2329.68,1250.6) Y2.4@2335.54,1282.79 ; 2306.54,1273.74 cw(c2329.68,1250.6) Y2.4@2335.54,1282.79 ; C32.1@2307.04,1195.87 ccw(c2347.32,1195.87) 2318.84,1167.38 ; C32.1@2307.04,1195.87 ccw(c2347.32,1195.87) 2318.84,1167.38 ; C32.1@2307.04,1195.87 ccw(c2347.32,1195.87) 2318.84,1167.38 ; 2308.43,1277.21 cw(c2338.93,1269.04) Y2.4@2337.56,1300.59 ; 2308.43,1277.21 cw(c2338.93,1269.04) Y2.4@2337.56,1300.59 ; 2308.43,1277.21 cw(c2338.93,1269.04) Y2.4@2337.56,1300.59 ; 2310.18,1269.09 ccw(c2305.83,1322.28) Y2.4@2346.52,1287.75 ; 2310.18,1269.09 ccw(c2305.83,1322.28) Y2.4@2346.52,1287.75 ; 2310.18,1269.09 ccw(c2305.83,1322.28) Y2.4@2346.52,1287.75 ; Y2.4@2310.55,1285.11 cw(c2338.56,1277.61) Y2.4@2337.3,1306.58 ; Y2.4@2310.55,1285.11 cw(c2338.56,1277.61) Y2.4@2337.3,1306.58 ; Y2.4@2310.55,1285.11 cw(c2338.56,1277.61) Y2.4@2337.3,1306.58 ; v1@2311.04,876.16 ccw(c2323.36,888.48) 2323.36,871.06 ; v1@2311.04,876.16 ccw(c2323.36,888.48) 2323.36,871.06 ; v1@2311.04,876.16 ccw(c2323.36,888.48) 2323.36,871.06 ; Y2.4@2313.07,1280.27 ccw(c2298.19,1295.15) Y2.4@2319.24,1295.15 ; Y2.4@2313.07,1280.27 ccw(c2298.19,1295.15) Y2.4@2319.24,1295.15 ; Y2.4@2313.07,1280.27 ccw(c2298.19,1295.15) Y2.4@2319.24,1295.15 ; v1@2315.29,867.95 cw(c2322.81,860.42) 2322.81,871.06 ; v1@2315.29,867.95 cw(c2322.81,860.42) 2322.81,871.06 ; v1@2315.29,867.95 cw(c2322.81,860.42) 2322.81,871.06 ; v1@2315.29,880.41 ccw(c2337.84,902.96) 2337.84,871.06 ; v1@2315.29,880.41 ccw(c2337.84,902.96) 2337.84,871.06 ; v1@2315.29,880.41 ccw(c2337.84,902.96) 2337.84,871.06 ; D3.2@2320.05,121.06 ccw(c2320.05,190.77) FB3.1@2369.35,141.48 ; D3.2@2320.05,121.06 ccw(c2320.05,190.77) FB3.1@2369.35,141.48 ; D3.2@2320.05,121.06 ccw(c2320.05,190.77) FB3.1@2369.35,141.48 ; Y2.4@2324.62,1270.27 ccw(c2321.45,1309.03) Y2.4@2351.09,1283.86 ; Y2.4@2324.62,1270.27 ccw(c2321.45,1309.03) Y2.4@2351.09,1283.86 ; Y2.4@2324.62,1270.27 ccw(c2321.45,1309.03) Y2.4@2351.09,1283.86 ; D3.2@2325.47,113.51 cw(c2343.71,95.27) 2343.71,121.06 ; D3.2@2325.47,113.51 cw(c2343.71,95.27) 2343.71,121.06 ; D3.2@2325.47,113.51 cw(c2343.71,95.27) 2343.71,121.06 ; D3.2@2325.47,128.62 ccw(c2343.71,146.86) 2343.71,121.06 ; D3.2@2325.47,128.62 ccw(c2343.71,146.86) 2343.71,121.06 ; D3.2@2325.47,128.62 ccw(c2343.71,146.86) 2343.71,121.06 ; D3.2@2325.53,130.53 ccw(c2336.47,141.29) 2340.4,126.45 ; D3.2@2325.53,130.53 ccw(c2336.47,141.29) 2340.4,126.45 ; D3.2@2325.53,130.53 ccw(c2336.47,141.29) 2340.4,126.45 ; D3.2@2325.53,130.53 ccw(c2336.47,141.29) 2340.4,126.45 ; D3.2@2325.53,130.53 ccw(c2336.47,141.29) 2340.4,126.45 ; D3.2@2329.71,109.26 cw(c2358.19,80.78) 2358.19,121.06 ; D3.2@2329.71,109.26 cw(c2358.19,80.78) 2358.19,121.06 ; D3.2@2329.71,109.26 cw(c2358.19,80.78) 2358.19,121.06 ; D3.2@2329.71,132.86 ccw(c2358.19,161.34) 2358.19,121.06 ; D3.2@2329.71,132.86 ccw(c2358.19,161.34) 2358.19,121.06 ; D3.2@2329.71,132.86 ccw(c2358.19,161.34) 2358.19,121.06 ; D3.2@2329.81,134.73 ccw(c2344.95,149.64) 2350.39,129.1 ; D3.2@2329.81,134.73 ccw(c2344.95,149.64) 2350.39,129.1 ; D3.2@2329.81,134.73 ccw(c2344.95,149.64) 2350.39,129.1 ; D3.2@2329.81,134.73 ccw(c2344.95,149.64) 2350.39,129.1 ; D3.2@2329.81,134.73 ccw(c2344.95,149.64) 2350.39,129.1 ; D3.2@2332.59,115.09 cw(c2357.7,101.48) 2350.39,129.1 ; D3.2@2332.59,115.09 cw(c2357.7,101.48) 2350.39,129.1 ; D3.2@2332.59,115.09 cw(c2357.7,101.48) 2350.39,129.1 ; D3.2@2332.59,115.09 cw(c2357.7,101.48) 2350.39,129.1 ; D3.2@2332.59,115.09 cw(c2357.7,101.48) 2350.39,129.1 ; D3.2@2332.62,115.16 cw(c2345.61,108.2) 2342.8,122.67 ; D3.2@2332.62,115.16 cw(c2345.61,108.2) 2342.8,122.67 ; D3.2@2332.62,115.16 cw(c2345.61,108.2) 2342.8,122.67 ; D3.2@2332.62,115.16 cw(c2345.61,108.2) 2342.8,122.67 ; D3.2@2332.62,115.16 cw(c2345.61,108.2) 2342.8,122.67 ; D3.2@2333.84,128.02 ccw(c2341.31,130.36) 2342.81,122.67 ; D3.2@2333.84,128.02 ccw(c2341.31,130.36) 2342.81,122.67 ; D3.2@2333.84,128.02 ccw(c2341.31,130.36) 2342.81,122.67 ; D3.2@2333.84,128.02 ccw(c2341.31,130.36) 2342.81,122.67 ; D3.2@2333.84,128.02 ccw(c2341.31,130.36) 2342.81,122.67 ; D3.2@2334.54,121.06 ccw(c2334.54,176.29) FB3.1@2373.59,137.24 ; D3.2@2334.54,121.06 ccw(c2334.54,176.29) FB3.1@2373.59,137.24 ; D3.2@2334.54,121.06 ccw(c2334.54,176.29) FB3.1@2373.59,137.24 ; 2349.02,121.06 ccw(c2349.02,161.8) FB3.1@2377.83,133 ; 2349.02,121.06 ccw(c2349.02,161.8) FB3.1@2377.83,133 ; 2349.02,121.06 ccw(c2349.02,161.8) FB3.1@2377.83,133 ; 2351.12,129.12 cw(c2358.67,117.99) FB3.1@2368.82,126.8 ; 2351.12,129.12 cw(c2358.67,117.99) FB3.1@2368.82,126.8 ; 2351.12,129.12 cw(c2358.67,117.99) FB3.1@2368.82,126.8 ; 2351.14,124.28 cw(c2361.58,106.2) FB3.1@2371.73,124.44 ; 2351.14,124.28 cw(c2361.58,106.2) FB3.1@2371.73,124.44 ; 2351.14,124.28 cw(c2361.58,106.2) FB3.1@2371.73,124.44 ; 2356.71,132.91 cw(c2363.81,122.45) FB3.1@2373.36,130.73 ; 2356.71,132.91 cw(c2363.81,122.45) FB3.1@2373.36,130.73 ; 2356.71,132.91 cw(c2363.81,122.45) FB3.1@2373.36,130.73 ; 2358.98,122.11 cw(c2367.97,106.53) FB3.1@2373.6,123.62 ; 2358.98,122.11 ccw(c2351.76,134.62) FB3.1@2366.19,134.18 ; 2358.98,122.11 cw(c2367.97,106.53) FB3.1@2373.6,123.62 ; 2358.98,122.11 ccw(c2351.76,134.62) FB3.1@2366.19,134.18 ; 2358.98,122.11 ccw(c2351.76,134.62) FB3.1@2366.19,134.18 ; 2358.98,122.11 cw(c2367.97,106.53) FB3.1@2373.6,123.62 ; 2360.31,129.57 cw(c2367.57,116.98) FB3.1@2374.64,129.68 ; 2360.31,129.57 cw(c2367.57,116.98) FB3.1@2374.64,129.68 ; 2360.31,129.57 cw(c2367.57,116.98) FB3.1@2374.64,129.68 ; 2361.78,130.42 ccw(c2356.64,139.3) FB3.1@2366.56,136.65 ; 2361.78,130.42 ccw(c2356.64,139.3) FB3.1@2366.56,136.65 ; 2361.78,130.42 ccw(c2356.64,139.3) FB3.1@2366.56,136.65 ; 2362.21,121.06 cw(c2369.92,113.35) FB3.1@2373.46,123.66 ; 2362.21,121.06 ccw(c2352.21,131.06) FB3.1@2366.26,132.65 ; 2362.21,121.06 ccw(c2352.21,131.06) FB3.1@2366.26,132.65 ; 2362.21,121.06 cw(c2369.92,113.35) FB3.1@2373.46,123.66 ; 2362.21,121.06 ccw(c2352.21,131.06) FB3.1@2366.26,132.65 ; 2362.21,121.06 cw(c2369.92,113.35) FB3.1@2373.46,123.66 ; 2362.3,136.7 cw(c2368.95,126.9) FB3.1@2377.89,134.66 ; 2362.3,136.7 cw(c2368.95,126.9) FB3.1@2377.89,134.66 ; 2362.3,136.7 cw(c2368.95,126.9) FB3.1@2377.89,134.66 ; FB3.1@2363.51,121.06 ccw(c2363.51,147.32) FB3.1@2382.07,128.75 ; FB3.1@2363.51,121.06 ccw(c2363.51,147.32) FB3.1@2382.07,128.75 ; FB3.1@2363.51,121.06 ccw(c2363.51,147.32) FB3.1@2382.07,128.75 ; 2366.08,871.06 cw(c2366.08,861.67) U6.4@2372.72,868.31 ; 2366.08,871.06 ccw(c2366.08,880.45) U6.4@2372.72,873.81 ; 2366.08,871.06 ccw(c2366.08,880.45) U6.4@2372.72,873.81 ; 2366.08,871.06 cw(c2366.08,861.67) U6.4@2372.72,868.31 ; 2366.08,871.06 ccw(c2366.08,880.45) U6.4@2372.72,873.81 ; 2366.08,871.06 cw(c2366.08,861.67) U6.4@2372.72,868.31 ; Y2.2@2420.43,1521.88 cw(c2378.5,1479.95) 2437.8,1479.95 ; Y2.2@2420.43,1521.88 cw(c2378.5,1479.95) 2437.8,1479.95 ; Y2.2@2420.43,1521.88 cw(c2378.5,1479.95) 2437.8,1479.95 ; Y2.2@2424.67,1526.12 cw(c2392.99,1494.44) 2437.8,1494.44 ; Y2.2@2424.67,1526.12 cw(c2392.99,1494.44) 2437.8,1494.44 ; Y2.2@2424.67,1526.12 cw(c2392.99,1494.44) 2437.8,1494.44 ; Y2.2@2427.2,1563.25 cw(c2464.74,1547.92) 2455.55,1587.42 ; Y2.2@2427.2,1563.25 cw(c2464.74,1547.92) 2455.55,1587.42 ; Y2.2@2427.2,1563.25 cw(c2464.74,1547.92) 2455.55,1587.42 ; Y2.2@2428.91,1530.36 cw(c2407.48,1508.92) 2437.8,1508.92 ; Y2.2@2428.91,1530.36 cw(c2407.48,1508.92) 2437.8,1508.92 ; Y2.2@2428.91,1530.36 cw(c2407.48,1508.92) 2437.8,1508.92 ; v1@2432.15,1459.32 cw(c2418.53,1445.7) 2437.8,1445.7 ; v1@2432.15,1459.32 cw(c2418.53,1445.7) 2437.8,1445.7 ; v1@2432.15,1459.32 cw(c2418.53,1445.7) 2437.8,1445.7 ; v1@2432.15,1471.78 ccw(c2418.53,1485.4) 2437.8,1485.4 ; v1@2432.15,1471.78 ccw(c2418.53,1485.4) 2437.8,1485.4 ; v1@2432.15,1471.78 ccw(c2418.53,1485.4) 2437.8,1485.4 ; Y2.2@2432.58,1560.5 cw(c2461.59,1551.78) Y2.2@2454.72,1581.27 ; Y2.2@2432.58,1560.5 cw(c2461.59,1551.78) Y2.2@2454.72,1581.27 ; Y2.2@2432.58,1560.5 cw(c2461.59,1551.78) Y2.2@2454.72,1581.27 ; Y2.2@2432.76,1560.99 cw(c2477.9,1542.55) 2466.85,1590.05 ; Y2.2@2432.76,1560.99 cw(c2477.9,1542.55) 2466.85,1590.05 ; Y2.2@2432.76,1560.99 cw(c2477.9,1542.55) 2466.85,1590.05 ; v1@2435.7,1409.12 cw(c2430.64,1404.06) 2437.8,1404.06 ; v1@2435.7,1409.12 cw(c2430.64,1404.06) 2437.8,1404.06 ; v1@2435.7,1409.12 cw(c2430.64,1404.06) 2437.8,1404.06 ; v1@2435.7,1421.58 ccw(c2430.64,1426.65) 2437.8,1426.65 ; v1@2435.7,1421.58 ccw(c2430.64,1426.65) 2437.8,1426.65 ; v1@2435.7,1421.58 ccw(c2430.64,1426.65) 2437.8,1426.65 ; 2437.8,1382.68 ccw(c2443.67,1388.55) v1@2447.72,1381.3 ; 2437.8,1382.68 ccw(c2443.67,1388.55) v1@2447.72,1381.3 ; 2437.8,1382.68 ccw(c2443.67,1388.55) v1@2447.72,1381.3 ; 2437.8,1382.68 Y2.2@2437.8,1549.09 2494.09,1605.39 ; 2437.8,1384.1 cw(c2473.18,1384.1) v1@2448.16,1409.12 ; 2437.8,1384.1 cw(c2473.18,1384.1) v1@2448.16,1409.12 ; 2437.8,1384.1 cw(c2473.18,1384.1) v1@2448.16,1409.12 ; 2437.8,1398.59 cw(c2458.7,1398.59) v1@2443.92,1413.37 ; 2437.8,1398.59 cw(c2458.7,1398.59) v1@2443.92,1413.37 ; 2437.8,1398.59 cw(c2458.7,1398.59) v1@2443.92,1413.37 ; 2437.8,1432.12 ccw(c2458.7,1432.12) v1@2443.92,1417.34 ; 2437.8,1432.12 ccw(c2458.7,1432.12) v1@2443.92,1417.34 ; 2437.8,1432.12 ccw(c2458.7,1432.12) v1@2443.92,1417.34 ; 2437.8,1442.86 cw(c2461.07,1442.86) v1@2444.61,1459.32 ; 2437.8,1442.86 cw(c2461.07,1442.86) v1@2444.61,1459.32 ; 2437.8,1442.86 cw(c2461.07,1442.86) v1@2444.61,1459.32 ; 2437.8,1446.61 ccw(c2473.18,1446.61) v1@2448.16,1421.58 ; 2437.8,1446.61 ccw(c2473.18,1446.61) v1@2448.16,1421.58 ; 2437.8,1446.61 ccw(c2473.18,1446.61) v1@2448.16,1421.58 ; 2437.8,1479.95 cw(c2497.09,1479.95) Y2.2@2455.16,1521.88 ; 2437.8,1479.95 cw(c2497.09,1479.95) Y2.2@2455.16,1521.88 ; 2437.8,1479.95 cw(c2497.09,1479.95) Y2.2@2455.16,1521.88 ; 2437.8,1488.24 ccw(c2461.07,1488.24) v1@2444.61,1471.78 ; 2437.8,1488.24 ccw(c2461.07,1488.24) v1@2444.61,1471.78 ; 2437.8,1488.24 ccw(c2461.07,1488.24) v1@2444.61,1471.78 ; 2437.8,1494.44 cw(c2482.6,1494.44) Y2.2@2450.92,1526.12 ; 2437.8,1494.44 cw(c2482.6,1494.44) Y2.2@2450.92,1526.12 ; 2437.8,1494.44 cw(c2482.6,1494.44) Y2.2@2450.92,1526.12 ; 2437.8,1508.92 cw(c2468.12,1508.92) Y2.2@2446.68,1530.36 ; 2437.8,1508.92 cw(c2468.12,1508.92) Y2.2@2446.68,1530.36 ; 2437.8,1508.92 cw(c2468.12,1508.92) Y2.2@2446.68,1530.36 ; Y2.2@2438.01,1565.48 ccw(c2439.21,1601.58) Y2.2@2464.75,1576.04 ; Y2.2@2438.01,1565.48 ccw(c2439.21,1601.58) Y2.2@2464.75,1576.04 ; Y2.2@2438.01,1565.48 ccw(c2439.21,1601.58) Y2.2@2464.75,1576.04 ; Y2.2@2438.03,1553.49 ccw(c2436.66,1585.04) 2467.16,1576.87 ; Y2.2@2438.03,1553.49 ccw(c2436.66,1585.04) 2467.16,1576.87 ; Y2.2@2438.03,1553.49 ccw(c2436.66,1585.04) 2467.16,1576.87 ; Y2.2@2438.21,1571.48 ccw(c2439.84,1620.51) 2474.53,1585.82 ; Y2.2@2438.21,1571.48 ccw(c2439.84,1620.51) 2474.53,1585.82 ; Y2.2@2438.21,1571.48 ccw(c2439.84,1620.51) 2474.53,1585.82 ; Y2.2@2438.29,1547.5 ccw(c2437.03,1576.47) Y2.2@2465.04,1568.96 ; Y2.2@2438.29,1547.5 ccw(c2437.03,1576.47) Y2.2@2465.04,1568.96 ; Y2.2@2438.29,1547.5 ccw(c2437.03,1576.47) Y2.2@2465.04,1568.96 ; Y2.2@2438.31,1558.72 cw(c2491.07,1537.17) 2478.15,1592.67 ; Y2.2@2438.31,1558.72 cw(c2491.07,1537.17) 2478.15,1592.67 ; Y2.2@2438.31,1558.72 cw(c2491.07,1537.17) 2478.15,1592.67 ; Y2.2@2438.33,1558.77 cw(c2473.02,1548.34) Y2.2@2464.81,1583.62 ; Y2.2@2438.33,1558.77 cw(c2473.02,1548.34) Y2.2@2464.81,1583.62 ; Y2.2@2438.33,1558.77 cw(c2473.02,1548.34) Y2.2@2464.81,1583.62 ; Y2.2@2438.41,1577.48 ccw(c2440.47,1639.45) 2484.31,1595.6 ; Y2.2@2438.41,1577.48 ccw(c2440.47,1639.45) 2484.31,1595.6 ; Y2.2@2438.41,1577.48 ccw(c2440.47,1639.45) 2484.31,1595.6 ; Y2.2@2438.61,1583.47 ccw(c2441.1,1658.38) 2494.09,1605.38 ; Y2.2@2438.61,1583.47 ccw(c2441.1,1658.38) 2494.09,1605.38 ; Y2.2@2438.61,1583.47 ccw(c2441.1,1658.38) 2494.09,1605.38 ; 2440.63,1379.84 cw(c2434.41,1373.61) v1@2443.21,1373.61 ; 2440.63,1379.84 cw(c2434.41,1373.61) v1@2443.21,1373.61 ; 2440.63,1379.84 cw(c2434.41,1373.61) v1@2443.21,1373.61 ; U5.99@2446.95,2140.57 cw(c2446.95,2133.55) 2451.91,2138.51 ; U5.99@2446.95,2140.57 cw(c2446.95,2133.55) 2451.91,2138.51 ; U5.99@2446.95,2140.57 cw(c2446.95,2133.55) 2451.91,2138.51 ; U5.99@2449.86,2143.47 ccw(c2456.87,2143.47) 2451.91,2138.51 ; U5.99@2449.86,2143.47 ccw(c2456.87,2143.47) 2451.91,2138.51 ; U5.99@2449.86,2143.47 ccw(c2456.87,2143.47) 2451.91,2138.51 ; v1@2450.99,1371 cw(c2441.66,1347.5) 2466.08,1354.05 ; v1@2450.99,1371 cw(c2441.66,1347.5) 2466.08,1354.05 ; v1@2450.99,1371 cw(c2441.66,1347.5) 2466.08,1354.05 ; v1@2452.02,1364.8 cw(c2452.02,1356) 2458.25,1362.22 ; v1@2452.02,1364.8 cw(c2452.02,1356) 2458.25,1362.22 ; v1@2452.02,1364.8 cw(c2452.02,1356) 2458.25,1362.22 ; v1@2453.2,1376.58 cw(c2447.15,1361.34) 2462.99,1365.58 ; v1@2453.2,1376.58 cw(c2447.15,1361.34) 2462.99,1365.58 ; v1@2453.2,1376.58 cw(c2447.15,1361.34) 2462.99,1365.58 ; v1@2454.84,1373.61 ccw(c2474.09,1373.61) 2460.47,1360 ; v1@2454.84,1373.61 ccw(c2474.09,1373.61) 2460.47,1360 ; v1@2454.84,1373.61 ccw(c2474.09,1373.61) 2460.47,1360 ; Y2.2@2456.35,1558.93 cw(c2477.4,1558.93) Y2.2@2462.52,1573.81 ; Y2.2@2456.35,1558.93 cw(c2477.4,1558.93) Y2.2@2462.52,1573.81 ; Y2.2@2456.35,1558.93 cw(c2477.4,1558.93) Y2.2@2462.52,1573.81 ; 2458.72,1167.38 cw(c2487.2,1138.9) C31.1@2487.2,1179.18 ; 2458.72,1167.38 ccw(c2430.24,1195.87) C31.1@2470.52,1195.87 ; 2458.72,1167.38 ccw(c2430.24,1195.87) C31.1@2470.52,1195.87 ; 2458.72,1167.38 cw(c2487.2,1138.9) C31.1@2487.2,1179.18 ; 2458.72,1167.38 ccw(c2430.24,1195.87) C31.1@2470.52,1195.87 ; 2458.72,1167.38 cw(c2487.2,1138.9) C31.1@2487.2,1179.18 ; v1@2460.84,1373.61 ccw(c2494.57,1373.61) 2470.72,1349.76 ; v1@2460.84,1373.61 ccw(c2494.57,1373.61) 2470.72,1349.76 ; v1@2460.84,1373.61 ccw(c2494.57,1373.61) 2470.72,1349.76 ; Y2.2@2462.35,1558.93 cw(c2497.88,1558.93) 2472.76,1584.05 ; Y2.2@2462.35,1558.93 cw(c2497.88,1558.93) 2472.76,1584.05 ; Y2.2@2462.35,1558.93 cw(c2497.88,1558.93) 2472.76,1584.05 ; 2465.44,1176.9 cw(c2492.58,1169.63) C31.1@2486.94,1197.15 ; 2465.44,1176.9 cw(c2492.58,1169.63) C31.1@2486.94,1197.15 ; 2465.44,1176.9 cw(c2492.58,1169.63) C31.1@2486.94,1197.15 ; C31.1@2467.95,1186.28 cw(c2490.4,1180.26) C31.1@2485.74,1203.03 ; C31.1@2467.95,1186.28 cw(c2490.4,1180.26) C31.1@2485.74,1203.03 ; C31.1@2467.95,1186.28 cw(c2490.4,1180.26) C31.1@2485.74,1203.03 ; 2468.24,1174.1 ccw(c2460.97,1201.24) C31.1@2488.49,1195.6 ; 2468.24,1174.1 ccw(c2460.97,1201.24) C31.1@2488.49,1195.6 ; 2468.24,1174.1 ccw(c2460.97,1201.24) C31.1@2488.49,1195.6 ; C31.1@2468.96,1177.63 cw(c2487.2,1159.39) C31.1@2487.2,1185.18 ; C31.1@2468.96,1177.63 ccw(c2450.72,1195.87) C31.1@2476.52,1195.87 ; C31.1@2468.96,1177.63 ccw(c2450.72,1195.87) C31.1@2476.52,1195.87 ; C31.1@2468.96,1177.63 cw(c2487.2,1159.39) C31.1@2487.2,1185.18 ; C31.1@2468.96,1177.63 ccw(c2450.72,1195.87) C31.1@2476.52,1195.87 ; C31.1@2468.96,1177.63 cw(c2487.2,1159.39) C31.1@2487.2,1185.18 ; 2474.35,1223.71 ccw(c2515.05,1223.71) C31.1@2486.27,1194.94 ; 2474.35,1223.71 ccw(c2515.05,1223.71) C31.1@2486.27,1194.94 ; 2474.35,1223.71 ccw(c2515.05,1223.71) C31.1@2486.27,1194.94 ; 2474.35,1238.2 ccw(c2529.54,1238.2) C31.1@2490.52,1199.18 ; 2474.35,1238.2 ccw(c2529.54,1238.2) C31.1@2490.52,1199.18 ; 2474.35,1238.2 ccw(c2529.54,1238.2) C31.1@2490.52,1199.18 ; 2474.35,1252.69 ccw(c2544.02,1252.69) C31.1@2494.76,1203.42 ; 2474.35,1252.69 ccw(c2544.02,1252.69) C31.1@2494.76,1203.42 ; 2474.35,1252.69 ccw(c2544.02,1252.69) C31.1@2494.76,1203.42 ; 2474.35,1267.17 ccw(c2558.51,1267.17) C31.1@2499,1207.66 ; 2474.35,1267.17 ccw(c2558.51,1267.17) C31.1@2499,1207.66 ; 2474.35,1267.17 ccw(c2558.51,1267.17) C31.1@2499,1207.66 ; C31.1@2475.61,1207.86 ccw(c2467.74,1216) 2477.54,1221.65 ; C31.1@2475.61,1207.86 ccw(c2467.74,1216) 2477.54,1221.65 ; C31.1@2475.61,1207.86 ccw(c2467.74,1216) 2477.54,1221.65 ; C31.1@2476.9,1208.99 ccw(c2468.15,1220.13) 2480.28,1227.44 ; C31.1@2476.9,1208.99 ccw(c2468.15,1220.13) 2480.28,1227.44 ; C31.1@2476.9,1208.99 ccw(c2468.15,1220.13) 2480.28,1227.44 ; 2477.54,1221.65 ccw(c2494.63,1231.52) C31.1@2490.61,1212.2 ; 2477.54,1221.65 ccw(c2494.63,1231.52) C31.1@2490.61,1212.2 ; 2477.54,1221.65 ccw(c2494.63,1231.52) C31.1@2490.61,1212.2 ; C31.1@2477.62,1176.61 ccw(c2471.6,1199.06) C31.1@2494.37,1194.4 ; C31.1@2477.62,1176.61 ccw(c2471.6,1199.06) C31.1@2494.37,1194.4 ; C31.1@2477.62,1176.61 ccw(c2471.6,1199.06) C31.1@2494.37,1194.4 ; C31.1@2479.78,1203.55 ccw(c2473.25,1210.3) C31.1@2481.38,1215 ; C31.1@2479.78,1203.55 ccw(c2473.25,1210.3) C31.1@2481.38,1215 ; C31.1@2479.78,1203.55 ccw(c2473.25,1210.3) C31.1@2481.38,1215 ; C31.1@2480.61,1204.27 ccw(c2472.38,1214.75) 2483.79,1221.62 ; C31.1@2480.61,1204.27 ccw(c2472.38,1214.75) 2483.79,1221.62 ; C31.1@2480.61,1204.27 ccw(c2472.38,1214.75) 2483.79,1221.62 ; C33.1@2482.3,1646.06 cw(c2453.81,1617.58) 2494.09,1617.58 ; C33.1@2482.3,1646.06 cw(c2453.81,1617.58) 2494.09,1617.58 ; C33.1@2482.3,1646.06 cw(c2453.81,1617.58) 2494.09,1617.58 ; C31.1@2484.31,1199.55 ccw(c2476.6,1209.37) 2487.29,1215.81 ; C31.1@2484.31,1199.55 ccw(c2476.6,1209.37) 2487.29,1215.81 ; C31.1@2484.31,1199.55 ccw(c2476.6,1209.37) 2487.29,1215.81 ; C33.1@2486.54,1650.3 cw(c2468.3,1632.06) 2494.09,1632.06 ; C33.1@2486.54,1650.3 cw(c2468.3,1632.06) 2494.09,1632.06 ; C33.1@2486.54,1650.3 cw(c2468.3,1632.06) 2494.09,1632.06 ; 2494.09,1617.58 cw(c2534.38,1617.58) C33.1@2505.89,1646.06 ; 2494.09,1617.58 cw(c2534.38,1617.58) C33.1@2505.89,1646.06 ; 2494.09,1617.58 cw(c2534.38,1617.58) C33.1@2505.89,1646.06 ; 2494.09,1632.06 cw(c2519.89,1632.06) C33.1@2501.65,1650.3 ; 2494.09,1632.06 cw(c2519.89,1632.06) C33.1@2501.65,1650.3 ; 2494.09,1632.06 cw(c2519.89,1632.06) C33.1@2501.65,1650.3 ; 2682.27,1049.15 cw(c2653.79,1020.67) C34.1@2694.07,1020.67